# EAGLE board EMSBUS (EAGLE 9.6.2)
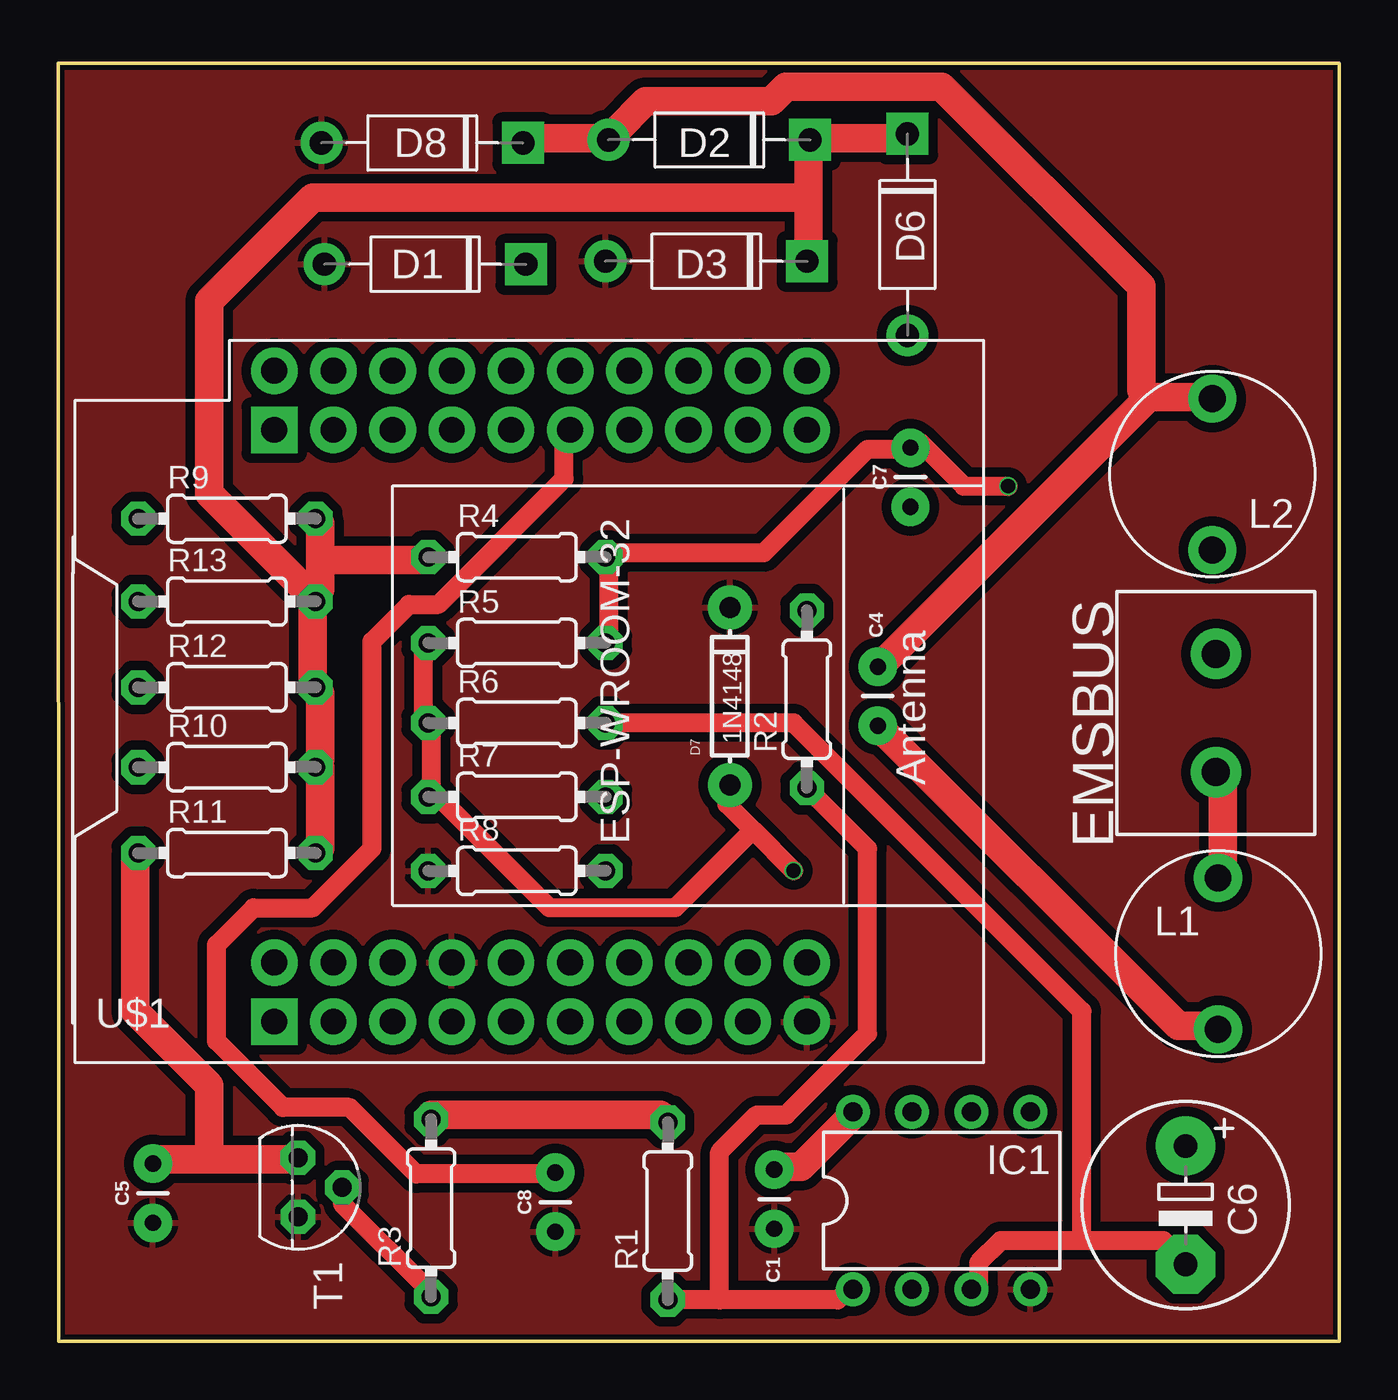
[diagram p0: board, top side]
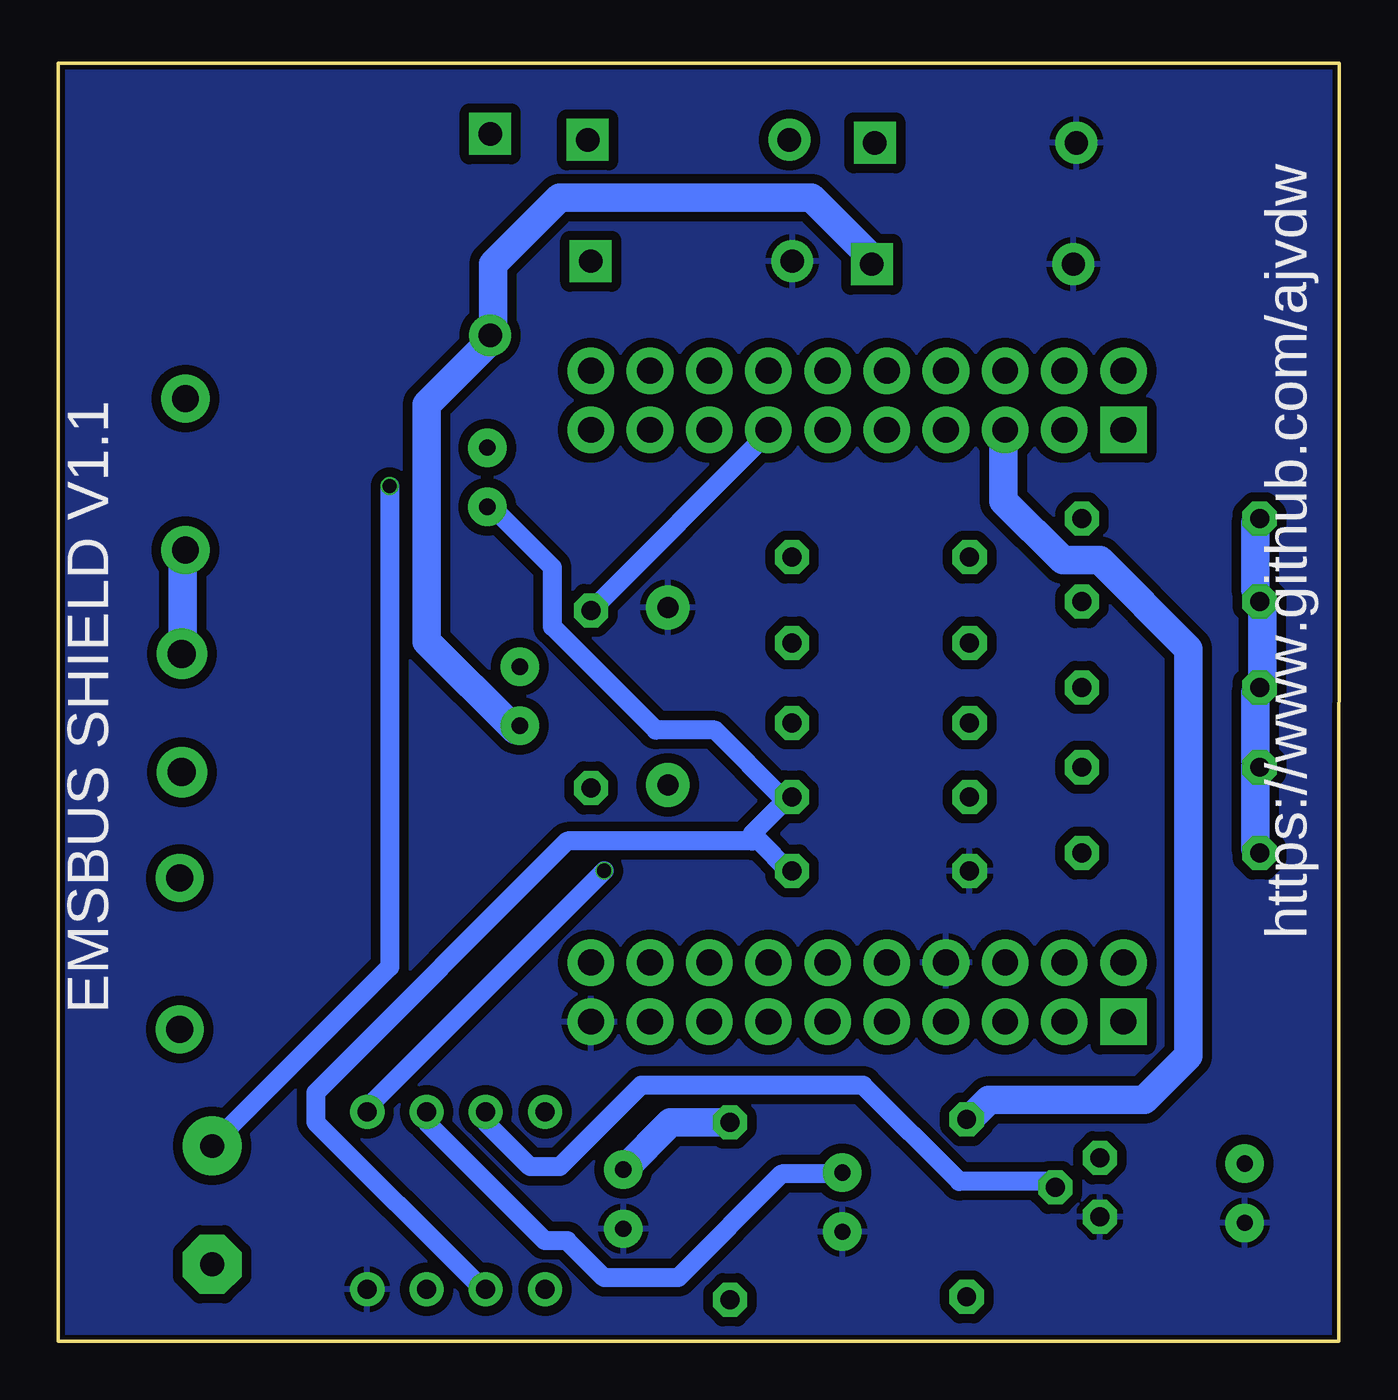
[diagram p1: board, bottom side, seen from below]

Size 54.99 x 54.86 mm. Coordinates in mm from the lower left corner, seen from the top.
Outline: 0.03,0 0,54.86 54.99,54.86 54.99,0 0.05,0
Copper layers (1*16): Top 0.035mm / dielectric 1.6mm / Bottom 0.035mm
Design rules "jlcpcb-2layers": minimum track width 5mil, minimum drill 0.3mm, track to track 5mil, track to pad 5mil, pad to pad 5mil, via to via 5mil, smd to smd 5mil, copper to edge 0.2mm, drill to drill 6mil, minimum pad ring 10mil, minimum via ring 3mil, stop-mask expansion 4mil, vias tented up to drill 0mil, thermal gap 10mil
Net classes: 0 default: width 0.813 mm, drill 0.61 mm, clearance 0.406 mm; 1 PWR: width 1.219 mm, drill 0.61 mm, clearance 0.406 mm; 3 GND: width 1.27 mm; 4 3V3: width 1.27 mm

## Footprints (pad centres in the part's own frame; a part is rotated, then mirrored left to right if it is on the bottom)
CAP-PTH-2.54 = drill 0.7 pad 1.651: 1 -1.27,0; 2 1.27,0
E5-8,5 = drill 1.016 pad 2.54: + -2.54,0 | drill 1.016 pad 2.54 octagon: - 2.54,0
DO-41 = drill 1: A 4.325,0 | drill 1 square: C -4.325,0
DIODE-1N4148 = drill 0.9 pad 1.88: A -3.81,0; C 3.81,0
TERMBLK_508-2N = drill 1.2: 1 0,0; 2 5.08,0
DIL08 = drill 0.813 pad 1.27: 1 -3.81,-3.81; 2 -1.27,-3.81; 3 1.27,-3.81; 4 3.81,-3.81; 5 3.81,3.81; 6 1.27,3.81; 7 -1.27,3.81; 8 -3.81,3.81
WE-FAMI_8010_744750230030 = drill 1.15: 1 -3.25,0; 2 3.25,0
0204/7 = drill 0.813 octagon: 1 -3.81,0; 2 3.81,0
TO92 = drill 0.813 octagon: 1 1.27,0; 2 0,1.905; 3 -1.27,0
MH-ET_ESP32_D1_MINI = drill 1.11 pad 1.665: 3V3 25.4,-5.08; CMD 27.94,0; GND 0,-22.86; GND2 2.54,-7.62; GND3 27.94,-22.86; IO0 0,-7.62; IO2 0,-5.08; IO4 0,-10.16; IO5 25.4,-7.62; IO16 2.54,-10.16; IO17 2.54,-12.7; IO18 25.4,-15.24; IO19 25.4,-12.7; IO21 2.54,-15.24; IO22 2.54,-17.78; IO23 25.4,-10.16; IO25 0,-17.78; IO26 25.4,-17.78; IO27 0,-20.32; IO32 0,-15.24; IO33 27.94,-12.7; IO34 27.94,-10.16; IO35 27.94,-15.24; NC 27.94,-20.32; NC2 27.94,-5.08; RST 25.4,-22.86; RXD 2.54,-20.32; SD0 2.54,0; SD1 0,-2.54; SD2 27.94,-2.54; SVN 27.94,-17.78; SVP 25.4,-20.32; TCK 25.4,-2.54; TD0 2.54,-2.54; TDI 0,-12.7; TMS 27.94,-7.62; TXD 2.54,-22.86; VCC 2.54,-5.08 | drill 1.11 pad 1.665 square: CLK 0,0; SD3 25.4,0

## Placement (x,y rotation side)
C1  100nF  [CAP-PTH-2.54]  30.73,6.1 270 top
C4  68pF  [CAP-PTH-2.54]  35.18,27.69 270 top
C5  1.5nF  [CAP-PTH-2.54]  4.06,6.35 90 top
C6  10uF  [E5-8,5]  48.39,5.84 270 top
C7  1nF  [CAP-PTH-2.54]  36.58,37.08 90 top
C8  10nF  [CAP-PTH-2.54]  21.34,5.97 90 top
D1  1N5817  [DO-41]  15.75,46.23 180 top
D2  1N5817  [DO-41]  27.94,51.56 180 top
D3  1N5817  [DO-41]  27.81,46.36 180 top
D6  1N5817  [DO-41]  36.45,47.5 270 top
D7  1N4148  [DIODE-1N4148]  28.83,27.69 90 top
D8  1N5817  [DO-41]  15.62,51.44 180 top
EMSBUS  2828XX-2282837-2  [TERMBLK_508-2N]  49.69,24.43 90 top
IC1  LM2903P  [DIL08]  37.92,6.04 0 top
L1  4.7mH  [WE-FAMI_8010_744750230030]  49.78,16.64 270 top
L2  4.7mH  [WE-FAMI_8010_744750230030]  49.53,37.21 90 top
R1  4K7  [0204/7]  26.16,5.59 90 top
R2  4K7  [0204/7]  32.13,27.56 270 top
R3  4K7  [0204/7]  16,5.71 90 top
R4  10K  [0204/7]  19.68,33.66 0 top
R5  360R  [0204/7]  19.68,29.97 0 top
R6  47K  [0204/7]  19.68,26.54 0 top
R7  10K  [0204/7]  19.68,23.37 0 top
R8  100K  [0204/7]  19.68,20.19 0 top
R9  1K  [0204/7]  7.24,35.31 0 top
R10  1K  [0204/7]  7.24,24.64 0 top
R11  1K  [0204/7]  7.24,20.95 0 top
R12  1K  [0204/7]  7.24,28.07 0 top
R13  1K  [0204/7]  7.24,31.75 0 top
T1  BC547  [TO92]  10.29,6.6 270 top
U$1  MH-ET_ESP32_D1_MINI  [MH-ET_ESP32_D1_MINI]  9.27,13.72 90 top

## Library data of the parts
C1 C4 C5 C7 C8 = SparkFun-Capacitors; PROD_ID: CAP-09128
C6 = resistor
D1-D3 D6 D8 = Diodes; CREATED_BY: PCBLayout.com; DIGIKEY_PART_NUMBER: 1N4007MSCT-ND; MANUFACTURER: Micro Commercial Co; MPN: 1N4007; PACKAGE: DO-41
D7 = BeagleBone_Blue_R3
EMSBUS = Connector; CATEGORY: Connector; DESCRIPTION: 2 Position Wire to Board Terminal Block Horizontal with Board 5.08 mm Through Hole; MANUFACTURER: TE Connectivity; MPN: 282837-2; OPERATING_TEMPERATURE: -40°C to +105°C; PART_STATUS: ACTIVE; ROHS_COMPLIANCE: RoHS Compliant; SERIES: 282837; SUBCATEGORY: Terminal Block; TYPE: Side Wire Entry
IC1 = linear; SPICEPREFIX: J
L1 L2 = Wurth_Elektronik_Passive_rev19e; WE-NUMBER: 744750230030/3uH
R1-R13 = BeagleBone_Black_Wireless
T1 = transistor
U$1 = MH-ET_ESP32_D1_MINI

## Nets
+3V3 [PWR]: C1.1 IC1.8 R1.2 R3.2 U$1.3V3
EMS_1 [PWR]: EMSBUS.1 L1.1
EMS_1L [PWR]: C4.2 D1.C D6.A L1.2
EMS_2 [PWR]: EMSBUS.2 L2.1
EMS_2L [PWR]: C4.1 D2.A D8.C L2.2
EMS_PULLDN [PWR]: C5.2 R9.1 R10.1 R11.1 R12.1 R13.1 T1.3
GND [PWR]: C1.2 C5.1 C8.1 D1.A D3.A D7.C D8.A IC1.4 R8.1 T1.1 U$1.GND U$1.GND2
N$1: IC1.7 R3.1 T1.2
N$3: IC1.1 R1.1 R2.2
N$5: D7.A IC1.5 R5.1 R6.1 R7.1
N$6: C6.+ C7.2 R4.2 R5.2
N$7: C7.1 IC1.2 R7.2 R8.2
N$8: C6.- IC1.3 R6.2
RECT_P [PWR]: D2.C D3.C D6.C R4.1 R9.2 R10.2 R11.2 R12.2 R13.2
RXD: R2.1 U$1.IO18
TXD: C8.2 IC1.6 U$1.IO19

## Tracks (layer width: path | path; a pad name or v marks a point on that pad's centre or on a via)
+3V3
  Top 1.219: IC1.8 34.1,9.72 31.88,7.49 30.92,7.49 C1.1 | R1.2 25.84,9.72 16,9.72 R3.2
  Bottom 1.219: U$1.3V3 14.41,38.93 14.41,36.07 11.88,33.53 10.29,33.53 6.48,29.72 6.48,12.26 8.38,10.35 15.05,10.35 16,9.4 R3.2 | C1.1 28.7,9.4 R1.2
EMS_1
  Top 1.219: L1.1 49.97,20.19 49.97,24.32 EMSBUS.1
EMS_1L
  Top 1.219: C4.2 48.07,13.53 49.66,13.53 L1.2
  Bottom 1.219: D1.C 20.13,46.23 20.13,46.55 22.67,49.08 33.46,49.08 36.32,46.23 36.32,43.37 D6.A 36.64,42.73 39.18,40.19 39.18,30.04 35.37,26.23 C4.2
EMS_2
  Bottom 1.219: L2.1 49.66,33.84 49.66,29.72 EMSBUS.2
EMS_2L
  Top 1.219: D8.C 20.13,51.62 23.3,51.62 D2.A 23.94,51.94 25.21,53.21 30.61,53.21 31.24,53.85 37.91,53.85 46.48,45.28 46.48,40.83 46.8,40.51 | 46.8,40.51 35.37,29.08 C4.1 | 46.8,40.51 49.34,40.51 L2.2
EMS_PULLDN
  Top 1.219: 6.48,7.81 4.25,7.81 C5.2 | 6.48,7.81 10.29,7.81 T1.3 | 6.48,7.81 6.48,10.99 3.3,14.16 3.3,20.83 R11.1
  Bottom 1.219: R11.1 3.62,21.14 3.62,24.64 R10.1 3.62,24.96 3.62,27.81 R12.1 3.3,28.45 3.3,31.62 R13.1 3.62,32.26 3.62,35.12 R9.1
GND
  pour Top: -1.4,54.74 -1.4,-1.02 -0.64,-1.78 55.12,-1.78 57.15,0.25 57.15,54.23 54.86,56.52 0,56.52 -1.4,55.12
  pour Bottom: -2.41,56.64 -2.41,-2.16 -1.02,-3.56 56.77,-3.56 57.15,-3.17 58.93,-1.4 58.93,0.25 58.93,55.12 58.17,55.88 55.5,58.55 0.51,58.55 -0.89,58.55 -2.16,57.28
N$1
  Top 0.813: T1.2 12.19,5.91 16,2.1 R3.1
  Bottom 0.813: IC1.7 36.64,9.72 36.64,9.4 34.73,7.49 33.46,7.49 29.97,10.99 20.45,10.99 16.32,6.86 12.19,6.86 T1.2
N$3
  Top 0.813: 28.38,1.78 33.46,1.78 34.1,2.41 IC1.1 | 28.38,1.78 R1.1 | R2.2 34.73,21.14 34.73,13.21 31.24,9.72 29.97,9.72 28.38,8.13 28.38,1.78
N$5  (via drill 0.61)
  Top 0.813: R5.1 15.68,29.72 15.68,26.86 R6.1 16,26.54 16,23.37 R7.1 16.32,23.37 21.08,18.61 26.48,18.61 29.81,21.94 | 29.81,21.94 28.7,23.05 28.7,23.69 D7.A | 29.81,21.94 v31.56,20.19
  Bottom 0.813: v31.56,20.19 41.72,10.03 IC1.5
N$6  (via drill 0.61)
  Top 0.813: R5.2 23.62,30.04 23.62,33.53 R4.2 23.62,33.84 30.29,33.84 34.73,38.29 36.32,38.29 C7.2 36.64,38.61 36.96,38.61 38.86,36.7 v40.77,36.7
  Bottom 0.813: v40.77,36.7 40.77,16.07 48.39,8.45 C6.+
N$7
  Bottom 0.813: 25.21,21.46 24.89,21.46 23.62,20.19 R8.2 | 25.21,21.46 33.15,21.46 43.94,10.67 43.94,9.4 36.96,2.41 IC1.2 | 25.21,21.46 25.21,21.78 23.62,23.37 R7.2 23.94,23.37 26.8,26.23 29.34,26.23 33.78,30.67 33.78,33.21 36.32,35.75 C7.1
N$8
  Top 0.813: 43.94,4.32 47.43,4.32 48.39,3.37 C6.- | 43.94,4.32 40.45,4.32 39.5,3.37 39.5,2.41 IC1.3 | R6.2 31.56,26.54 43.94,14.16 43.94,4.32
RECT_P
  Top 1.219: 32.2,49.08 32.2,51.31 D2.C 32.83,51.62 36.32,51.62 D6.C | 32.2,49.08 32.2,46.55 D3.C | R11.2 11.24,21.14 11.24,24.64 R10.2 11.24,24.96 11.24,27.81 R12.2 10.92,28.45 10.92,31.62 R13.2 | 11.24,33.53 11.24,32.26 R13.2 | 11.24,33.53 11.24,35.12 R9.2 | 11.24,33.53 15.68,33.53 R4.1 | 32.2,49.08 10.92,49.08 6.48,44.64 6.48,36.39 10.6,32.26 R13.2
RXD
  Bottom 0.813: R2.1 24.57,38.93 U$1.IO18
TXD
  Top 0.813: U$1.IO19 21.72,38.93 21.72,37.02 16.32,31.62 15.05,31.62 13.46,30.04 13.46,21.14 10.92,18.61 8.38,18.61 6.79,17.02 6.79,12.89 9.65,10.03 12.51,10.03 15.37,7.18 21.08,7.18 C8.2
  Bottom 0.813: IC1.6 39.18,9.72 39.18,9.4 34.1,4.32 33.15,4.32 31.56,2.73 28.38,2.73 23.94,7.18 21.4,7.18 C8.2

## Text on the board
bNames: https://www.github.com/ajvdw | EMSBUS SHIELD V1.1